# Altium PCB PCB1.PcbDoc
Units mil, origin at the board's own origin, x right, y up, seen from the top; angles counter-clockwise.
Board outline 6000 x 4000 mil, 2 copper layers (Top Layer, Bottom Layer); 64 components, 8 nets, 160 pads, 0 vias.
Unrouted connection lines stored in the file: 2.
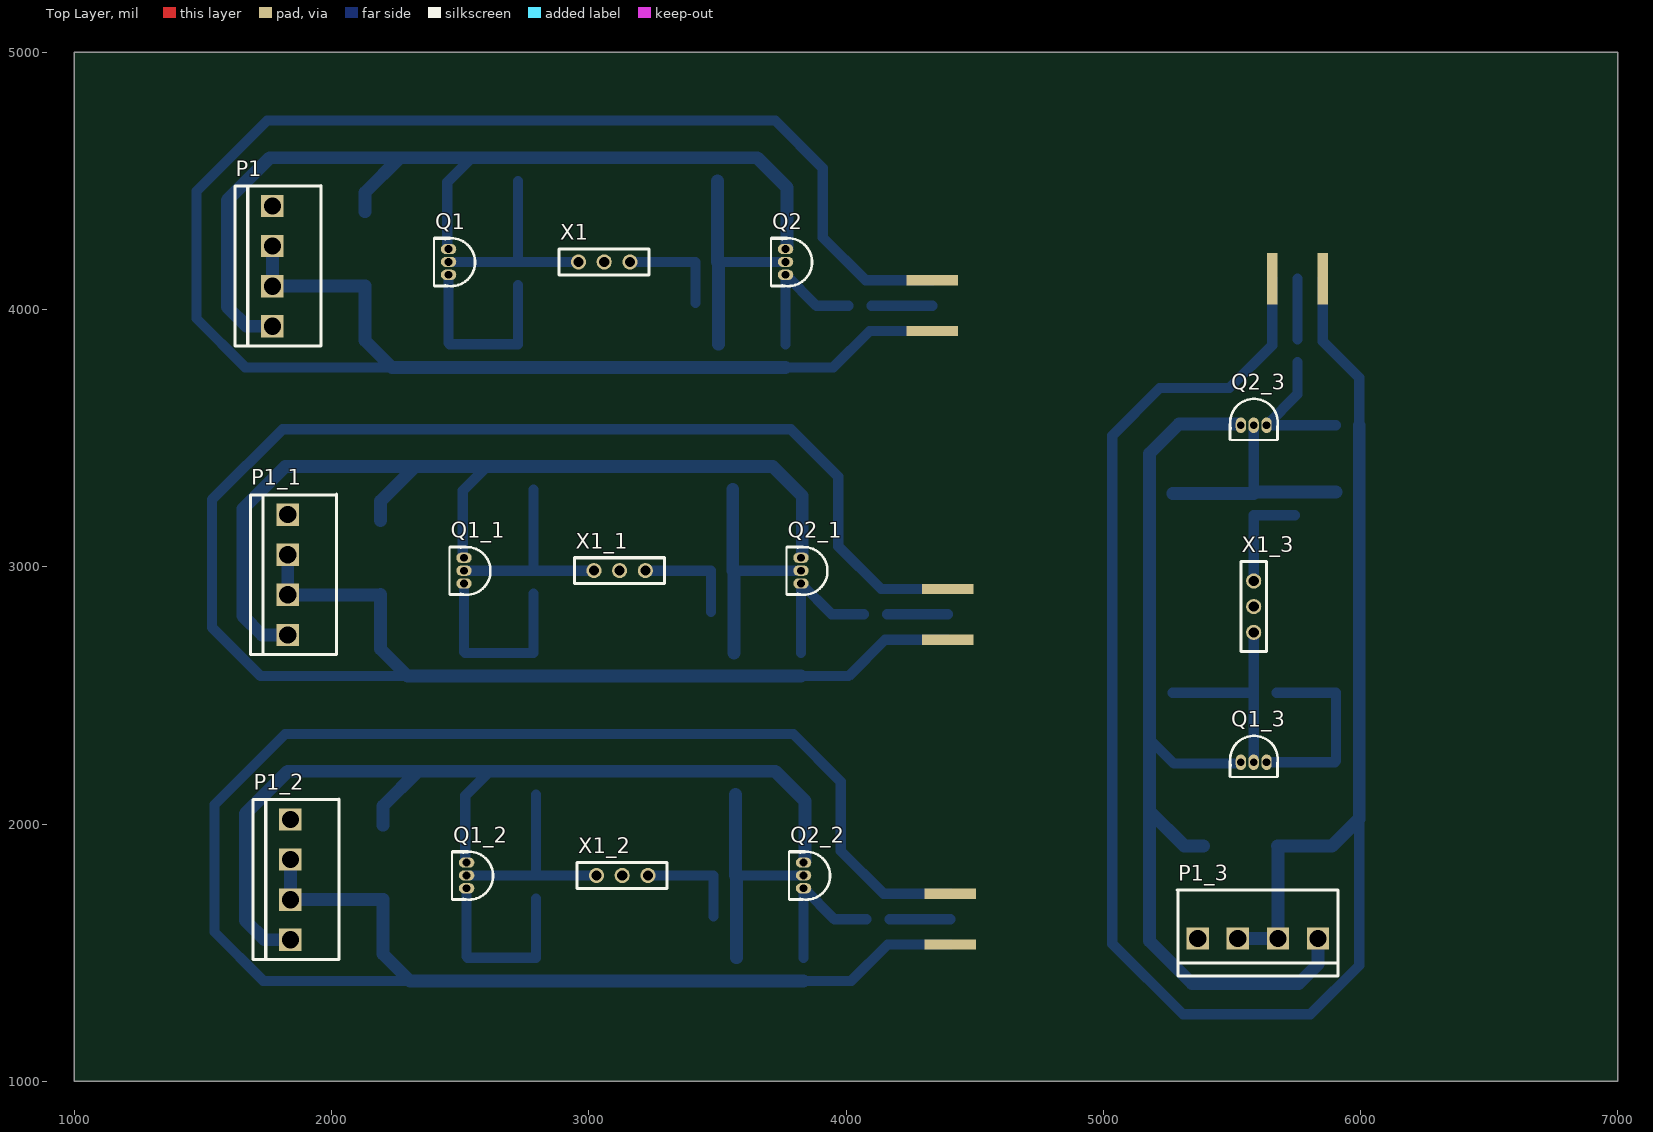
[diagram p0: Top Layer view]
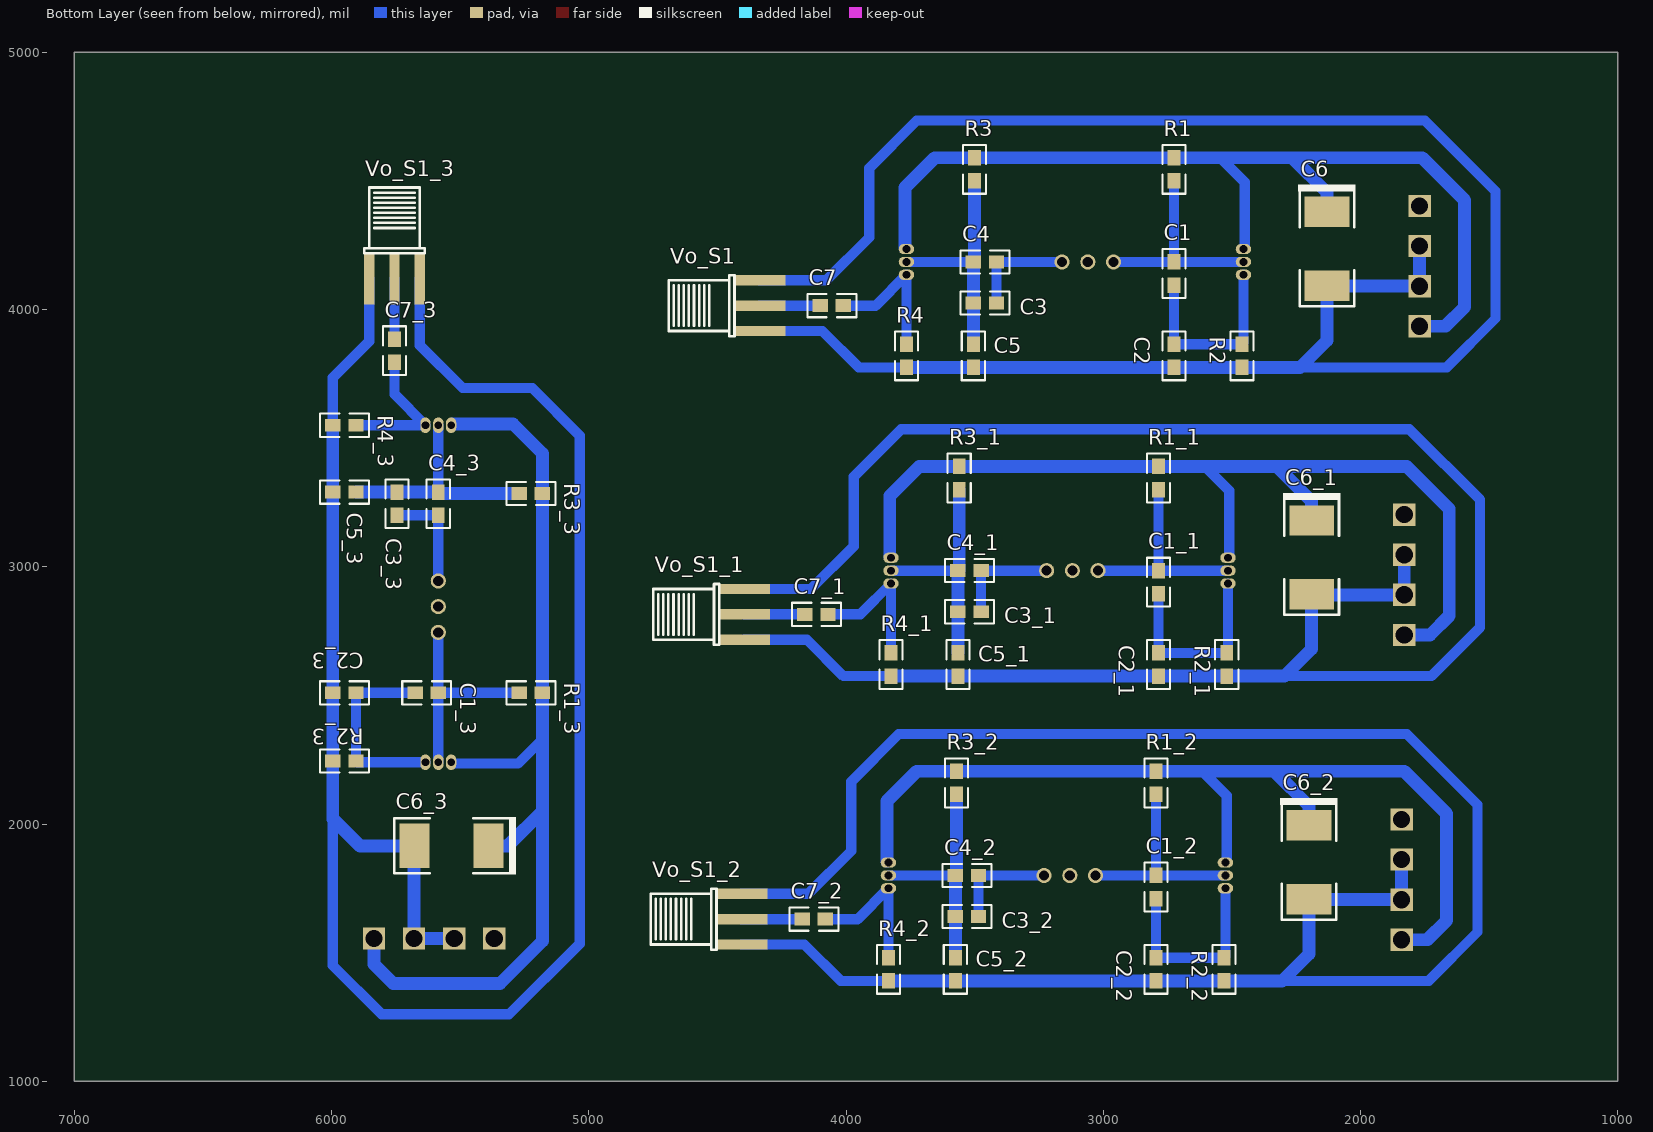
[diagram p1: Bottom Layer view, seen from below]

## Layer stack, top to bottom
Top Solder: solder mask 0.4, Solder Resist, Dk 3.5
Top Layer: signal copper 1.4
Dielectric 1: dielectric 12.6, FR-4, Dk 4.8
Bottom Layer: signal copper 1.4
Bottom Solder: solder mask 0.4, Solder Resist, Dk 3.5

## Board outline
1000,1000 7000,1000 7000,5000 1000,5000

## Design rules (kind name [scope] priority, off if disabled: settings)
Clearance [All] p1: gap=10
PolygonConnect [All] p1: connectstyle=Relief reliefconductorwidth=10 reliefentries=4 polygonreliefangle="90 Angle" airgapwidth=10
RoutingVias [All] p1: holewidth=28 width=50 viastyle="Through Hole" minholewidth=28 minwidth=50 maxholewidth=28 maxwidth=50
SolderMaskExpansion [All] p1: expansion=4
Width [All] p1: maxlimit=100 minlimit=10 preferedwidth=10
30 further rules are at their usual default settings.

## Components (designator, comment, footprint, x,y, rotation, side; value= is the part's Value field where it differs from the comment)
C1 "0.1uf" 0805 2725,4095 r90 bottom
C1_1 "0.1uf" 0805 2785,2895 r90 bottom (schematic designator C1)
C1_2 "0.1uf" 0805 2795,1710 r90 bottom (schematic designator C1)
C1_3 "0.1uf" 0805 5675,2510 r180 bottom (schematic designator C1)
C2 "0.1uf" 0805 2725,3775 r90 bottom
C2_1 "0.1uf" 0805 2785,2575 r90 bottom (schematic designator C2)
C2_2 "0.1uf" 0805 2795,1390 r90 bottom (schematic designator C2)
C2_3 "0.1uf" 0805 5995,2510 r180 bottom (schematic designator C2)
C3 "0.1uf" 0805 3505,4025 r180 bottom
C3_1 "0.1uf" 0805 3565,2825 r180 bottom (schematic designator C3)
C3_2 "0.1uf" 0805 3575,1640 r180 bottom (schematic designator C3)
C3_3 "0.1uf" 0805 5745,3290 r270 bottom (schematic designator C3)
C4 "0.1uf" 0805 3505,4185 r180 bottom
C4_1 "0.1uf" 0805 3565,2985 r180 bottom (schematic designator C4)
C4_2 "0.1uf" 0805 3575,1800 r180 bottom (schematic designator C4)
C4_3 "0.1uf" 0805 5585,3290 r270 bottom (schematic designator C4)
C5 "0.1uf" 0805 3505,3865 r270 bottom
C5_1 "0.1uf" 0805 3565,2665 r270 bottom (schematic designator C5)
C5_2 "0.1uf" 0805 3575,1480 r270 bottom (schematic designator C5)
C5_3 "0.1uf" 0805 5905,3290 r0 bottom (schematic designator C5)
C6 "Cap" 7343C-TYPE_D 2130,4380 r90 bottom
C6_1 "Cap" 7343C-TYPE_D 2190,3180 r90 bottom (schematic designator C6)
C6_2 "Cap" 7343C-TYPE_D 2200,1995 r90 bottom (schematic designator C6)
C6_3 "Cap" 7343C-TYPE_D 5390,1915 r180 bottom (schematic designator C6)
C7 "0.1uf" 0805 4010,4015 r0 bottom
C7_1 "0.1uf" 0805 4070,2815 r0 bottom (schematic designator C7)
C7_2 "0.1uf" 0805 4080,1630 r0 bottom (schematic designator C7)
C7_3 "0.1uf" 0805 5755,3795 r90 bottom (schematic designator C7)
P1 "VH3.96-4P" VH3.96-4P 1624.33,3858.23 r90 top
P1_1 "VH3.96-4P" VH3.96-4P 1684.33,2658.23 r90 top (schematic designator P1)
P1_2 "VH3.96-4P" VH3.96-4P 1694.33,1473.23 r90 top (schematic designator P1)
P1_3 "VH3.96-4P" VH3.96-4P 5911.77,1409.33 r180 top (schematic designator P1)
Q1 "NPN" TO-92 2455,4235 r90 top
Q1_1 "NPN" TO-92 2515,3035 r90 top (schematic designator Q1)
Q1_2 "NPN" TO-92 2525,1850 r90 top (schematic designator Q1)
Q1_3 "NPN" TO-92 5535,2240 r180 top (schematic designator Q1)
Q2 "NPN" TO-92 3765,4235 r90 top
Q2_1 "NPN" TO-92 3825,3035 r90 top (schematic designator Q2)
Q2_2 "NPN" TO-92 3835,1850 r90 top (schematic designator Q2)
Q2_3 "NPN" TO-92 5535,3550 r180 top (schematic designator Q2)
R1 "0" 0805 2725,4500 r90 bottom
R1_1 "0" 0805 2785,3300 r90 bottom (schematic designator R1)
R1_2 "0" 0805 2795,2115 r90 bottom (schematic designator R1)
R1_3 "0" 0805 5270,2510 r180 bottom (schematic designator R1)
R2 "0" 0805 2460,3775 r90 bottom
R2_1 "0" 0805 2520,2575 r90 bottom (schematic designator R2)
R2_2 "0" 0805 2530,1390 r90 bottom (schematic designator R2)
R2_3 "0" 0805 5995,2245 r180 bottom (schematic designator R2)
R3 "0" 0805 3500,4500 r90 bottom
R3_1 "0" 0805 3560,3300 r90 bottom (schematic designator R3)
R3_2 "0" 0805 3570,2115 r90 bottom (schematic designator R3)
R3_3 "0" 0805 5270,3285 r180 bottom (schematic designator R3)
R4 "0" 0805 3765,3775 r90 bottom
R4_1 "0" 0805 3825,2575 r90 bottom (schematic designator R4)
R4_2 "0" 0805 3835,1390 r90 bottom (schematic designator R4)
R4_3 "0" 0805 5995,3550 r180 bottom (schematic designator R4)
Vo_S1 "差分输出" SMA-LYING 4394.06,4011.06 r180 bottom
Vo_S1_1 "差分输出" SMA-LYING 4454.06,2811.06 r180 bottom (schematic designator Vo_S1)
Vo_S1_2 "差分输出" SMA-LYING 4464.06,1626.06 r180 bottom (schematic designator Vo_S1)
Vo_S1_3 "差分输出" SMA-LYING 5758.94,4179.06 r270 bottom (schematic designator Vo_S1)
X1 "XAL" DIP-3P 2960,4185 r0 top
X1_1 "XAL" DIP-3P 3020,2985 r0 top (schematic designator X1)
X1_2 "XAL" DIP-3P 3030,1800 r0 top (schematic designator X1)
X1_3 "XAL" DIP-3P 5585,2745 r90 top (schematic designator X1)

## Footprints (in the part's own frame and the unit in brackets; to place one, negate y for a bottom-side part, rotate by r counter-clockwise, add the part's x,y. Pads: shape width x height; smd on the part's side, far side on the other; paste and mask are expansions set on the pad)
0805 [mil]
  rect 60x50 smd: 1(0,0) 2(90,0)
  silkscreen extent -50,-45 140,45
7343C-TYPE_D [mm]
  rect 3x4.4 smd: 1(0,0) 2(-7.3,0)
  silkscreen extent -9.31,-2.84 2.7,2.84
DIP-3P [mm]
  round 1.5 hole 1: 1(0,0) 2(2.54,0) 3(5.08,0)
  silkscreen extent -1.91,-1.27 6.98,1.27
SMA-LYING [mm]
  rect 5.08x1.016 smd: 0(1.5,0.1) 1(1.5,-2.4) 1(1.5,2.6)
  rect 5.08x1.016 smd far side: 1(1.5,-2.4) 1(1.5,2.6)
  silkscreen extent -7.5,-2.9 -1,3.1
TO-92 [mil]
  oval 40x60 hole 30: 1(0,0) 2(-50,0) 3(-100,0)
  silkscreen extent -144,-103 42,57
VH3.96-4P [mm]
  rect 2.2x2.2 hole 1.7: 1(1.95,-3.7) 2(5.91,-3.7) 3(9.87,-3.7) 4(13.83,-3.7)
  silkscreen extent 0,-8.5 15.87,0

## Part data
C1 C1_1 C1_2 C1_3 C2 C2_1 C2_2 C2_3 C3 C3_1 C3_2 C3_3 C4 C4_1 C4_2 C4_3 C5 C5_1 C5_2 C5_3 C7 C7_1 C7_2 C7_3: library part Cap
C6 C6_1 C6_2 C6_3: library part "Tantalium Cap"
Q1 Q1_1 Q1_2 Q1_3 Q2 Q2_1 Q2_2 Q2_3: "NPN Transistor"
R1 R1_1 R1_2 R1_3 R2 R2_1 R2_2 R2_3 R3 R3_1 R3_2 R3_3 R4 R4_1 R4_2 R4_3: library part Res
Vo_S1 Vo_S1_1 Vo_S1_2 Vo_S1_3: library part SMA

## Nets (pads, with @x,y where several pads share a name; then routed paths per layer and width w, separated by ;. In a path a pad name is that pad's centre, name@x,y a point inside that pad or via, vN(x,y) a via of type N, cw(c..) or ccw(c..) an arc to the next point about the centre after c; other vN are vias at no path point)
GND: C2.1 C5.2 C6.2 P1.2 P1.3 R2.1 R4.1 Vo_S1.1 | length 7759.6
  Bottom Layer w40: 2235,3775 1665,3775 1475,3965 1475,4460 1750,4735 3725,4735 3910,4550 3910,4280 4076.57,4113.43 Vo_S1.1@4335,4113.43 ; R4.1 3950,3775 4091.57,3916.57 Vo_S1.1@4335,3916.57
  Bottom Layer w50: P1.3 P1.2 2128.31,4090.91 C6.2 2130,3880 2235,3775 R2.1 C2.1 C5.2 R4.1
NetC1_1: C1.1 C2.2 Q1.3 R2.2 | length 767.1
  Bottom Layer w40: Q1.3 2455,3870 R2.2 C2.2 C1.1
NetC1_2: C1.2 Q1.2 R1.1 X1.1 | length 820
  Bottom Layer w40: Q1.2 C1.2 ; R1.1 C1.2 ; X1.1 C1.2
NetC3_1: C3.1 C4.1 C5.1 Q2.2 R3.1 | length 895
  Bottom Layer w40: C4.1 Q2.2
  Bottom Layer w50: C4.1@3500,4185 R3.1 ; C5.1 C3.1 C4.1
NetC3_2: C3.2 C4.2 X1.3 | length 415
  Bottom Layer w40: X1.3 C4.2 C3.2
NetC7_1: C7.1 Q2.3 R4.2 | length 564.7
  Bottom Layer w40: R4.2 Q2.3 3885,4015 C7.1
NetC7_2: C7.2 Vo_S1.0 | length 235
  Bottom Layer w40: C7.2 Vo_S1.0
VCC: C6.1 P1.1 Q1.1 Q2.1 R1.2 R3.2 | length 3792.3
  Bottom Layer w40: Q1.1@2450,4250 2450,4495 2545,4590
  Bottom Layer w50: P1.1 1670,3935 1595,4010 1595,4425 1760,4590 2265,4590 ; C6.1 2130,4455 2265,4590 ; Q2.1@3770,4240 3770,4475 3655,4590 R3.2 R1.2 2545,4590 2265,4590
pads on no net: C1_1.1 C1_1.2 C1_2.1 C1_2.2 C1_3.1 C1_3.2 C2_1.1 C2_1.2 C2_2.1 C2_2.2 C2_3.1 C2_3.2 C3_1.1 C3_1.2 C3_2.1 C3_2.2 C3_3.1 C3_3.2 C4_1.1 C4_1.2 C4_2.1 C4_2.2 C4_3.1 C4_3.2 C5_1.1 C5_1.2 C5_2.1 C5_2.2 C5_3.1 C5_3.2 C6_1.1 C6_1.2 C6_2.1 C6_2.2 C6_3.1 C6_3.2 C7_1.1 C7_1.2 C7_2.1 C7_2.2 C7_3.1 C7_3.2 P1.4 P1_1.1 P1_1.2 P1_1.3 P1_1.4 P1_2.1 P1_2.2 P1_2.3 P1_2.4 P1_3.1 P1_3.2 P1_3.3 P1_3.4 Q1_1.1 Q1_1.2 Q1_1.3 Q1_2.1 Q1_2.2 Q1_2.3 Q1_3.1 Q1_3.2 Q1_3.3 Q2_1.1 Q2_1.2 Q2_1.3 Q2_2.1 Q2_2.2 Q2_2.3 Q2_3.1 Q2_3.2 Q2_3.3 R1_1.1 R1_1.2 R1_2.1 R1_2.2 R1_3.1 R1_3.2 R2_1.1 R2_1.2 R2_2.1 R2_2.2 R2_3.1 R2_3.2 R3_1.1 R3_1.2 R3_2.1 R3_2.2 R3_3.1 R3_3.2 R4_1.1 R4_1.2 R4_2.1 R4_2.2 R4_3.1 R4_3.2 Vo_S1_1.0 Vo_S1_1.1 Vo_S1_2.0 Vo_S1_2.1 Vo_S1_3.0 Vo_S1_3.1 X1.2 X1_1.1 X1_1.2 X1_1.3 X1_2.1 X1_2.2 X1_2.3 X1_3.1 X1_3.2 X1_3.3
copper on no net: | length 45746
  Bottom Layer w40: 2295,2575 1725,2575 1535,2765 1535,3260 1810,3535 3785,3535 3970,3350 3970,3080 4136.57,2913.43 4395,2913.43 ; 2305,1390 1735,1390 1545,1580 1545,2075 1820,2350 3795,2350 3980,2165 3980,1895 4146.57,1728.43 4405,1728.43 ; 2510,3050 2510,3295 2605,3390 ; 2515,2935 2515,2670 2520,2665 2785,2665 2785,2895 ; 2515,2985 2785,2985 ; 2520,1865 2520,2110 2615,2205 ; 2525,1750 2525,1485 2530,1480 2795,1480 2795,1710 ; 2525,1800 2795,1800 ; 2785,3300 2785,2985 ; 2795,2115 2795,1800 ; 3020,2985 2785,2985 ; 3030,1800 2795,1800 ; 3220,2985 3475,2985 3475,2825 ; 3230,1800 3485,1800 3485,1640 ; 3565,2985 3825,2985 ; 3575,1800 3835,1800 ; 3825,2575 4010,2575 4151.57,2716.57 4395,2716.57 ; 3825,2665 3825,2935 3945,2815 4070,2815 ; 3835,1390 4020,1390 4161.57,1531.57 4405,1531.57 ; 3835,1480 3835,1750 3955,1630 4080,1630 ; 4160,2815 4395,2815 ; 4170,1630 4405,1630 ; 5180,2330 5275,2235 5520,2235 ; 5270,2510 5585,2510 ; 5585,2240 5585,2510 ; 5585,2745 5585,2510 ; 5585,2945 5585,3200 5745,3200 ; 5585,3290 5585,3550 ; 5635,2240 5900,2240 5905,2245 5905,2510 5675,2510 ; 5656.57,4120 5656.57,3861.57 5490,3695 5220,3695 5035,3510 5035,1535 5310,1260 5805,1260 5995,1450 5995,2020 ; 5755,3795 5755,3670 5635,3550 5905,3550 ; 5755,3885 5755,4120 ; 5853.43,4120 5853.43,3876.57 5995,3735 5995,3550
  Bottom Layer w50: 1830,2735 1730,2735 1655,2810 1655,3225 1820,3390 2325,3390 ; 1830,3046.81 1830,2890.91 2188.31,2890.91 2190,2892.6 2190,2680 2295,2575 2520,2575 2785,2575 3565,2575 3825,2575 ; 1840,1550 1740,1550 1665,1625 1665,2040 1830,2205 2335,2205 ; 1840,1861.81 1840,1705.91 2198.31,1705.91 2200,1707.6 2200,1495 2305,1390 2530,1390 2795,1390 3575,1390 3835,1390 ; 2190,3180 2190,3255 2325,3390 ; 2200,1995 2200,2070 2335,2205 ; 3560,2985 3560,3300 ; 3565,2665 3565,2825 3565,2985 ; 3570,1800 3570,2115 ; 3575,1480 3575,1640 3575,1800 ; 3830,3040 3830,3275 3715,3390 3560,3390 2785,3390 2605,3390 2325,3390 ; 3840,1855 3840,2090 3725,2205 3570,2205 2795,2205 2615,2205 2335,2205 ; 5270,3285 5585,3285 ; 5390,1915 5315,1915 5180,2050 ; 5523.19,1555 5679.09,1555 5679.09,1913.31 5677.4,1915 5890,1915 5995,2020 5995,2245 5995,2510 5995,3290 5995,3550 ; 5530,3555 5295,3555 5180,3440 5180,3285 5180,2510 5180,2330 5180,2050 ; 5585,3290 5745,3290 5905,3290 ; 5835,1555 5835,1455 5760,1380 5345,1380 5180,1545 5180,2050